# Altium PCB PCB1.PcbDoc
Units mil, origin at the board's own origin, x right, y up, seen from the top; angles counter-clockwise.
Board outline 6000 x 4000 mil, 2 copper layers (Top Layer, 2nd layer); 45 components, 28 nets, 127 pads, 38 vias.
Unrouted connection lines stored in the file: 7.
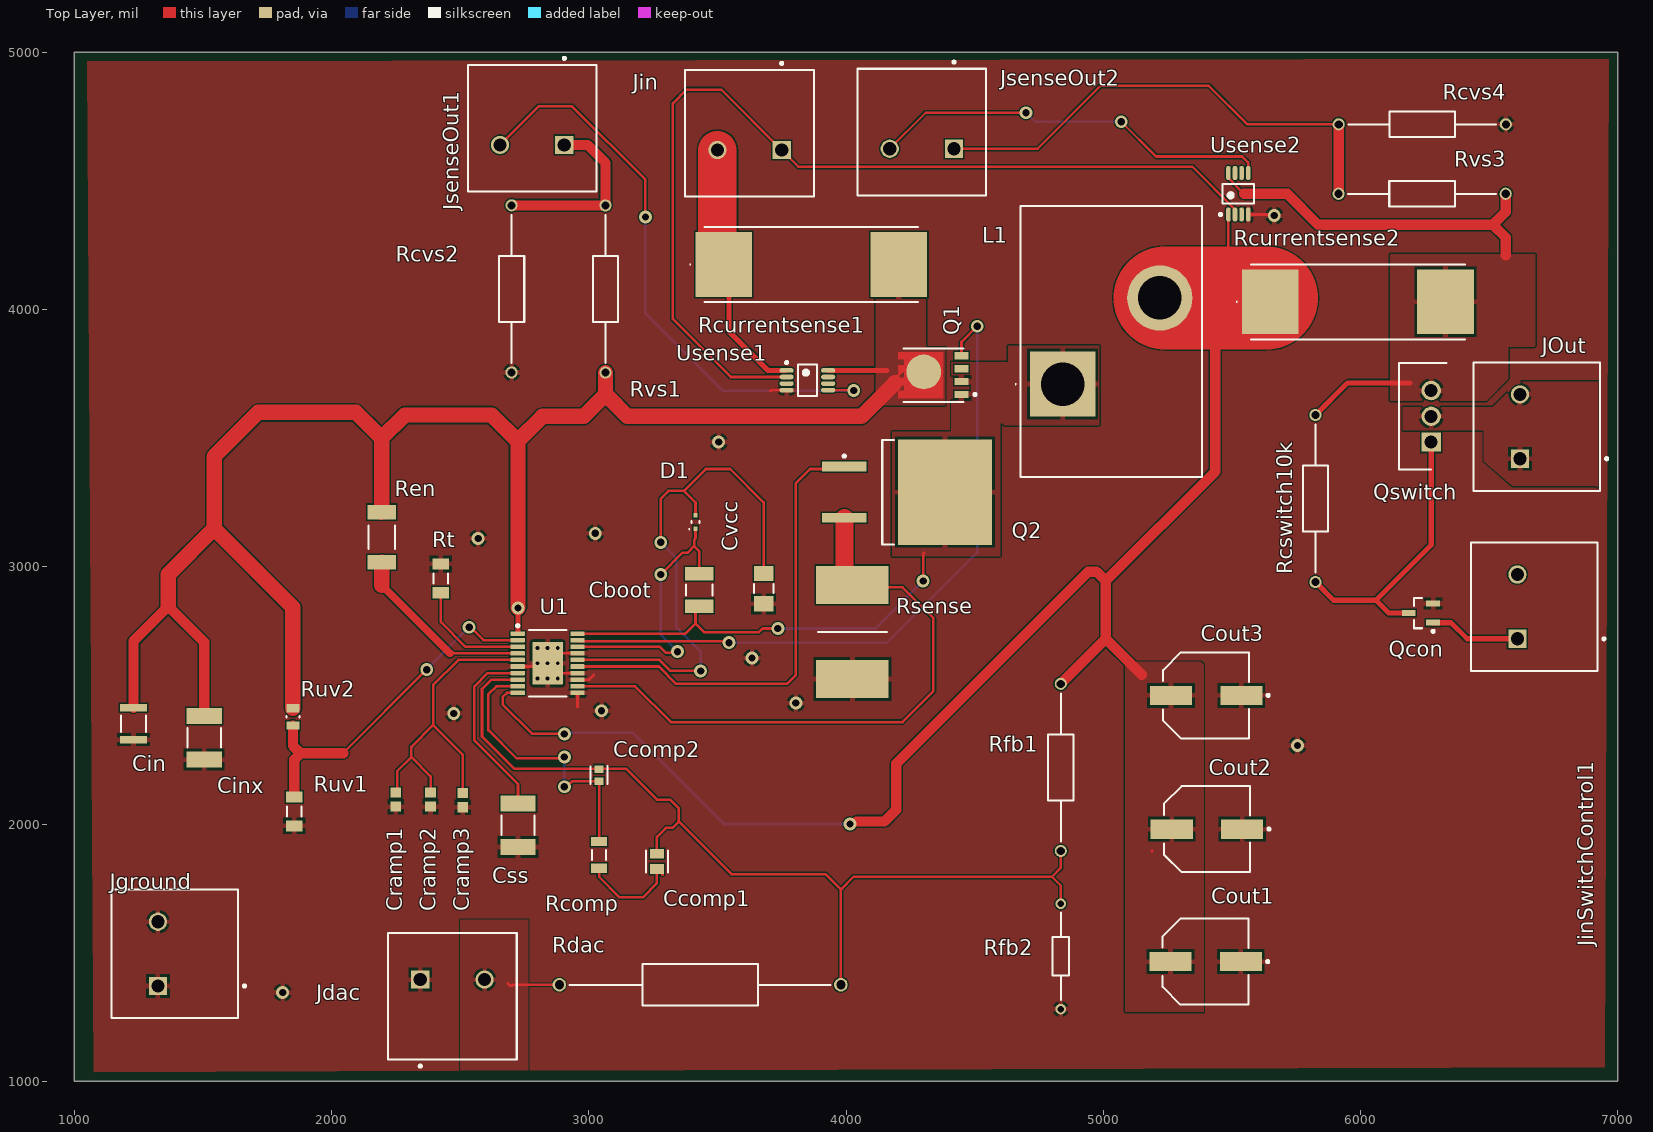
[diagram p0: Top Layer view]
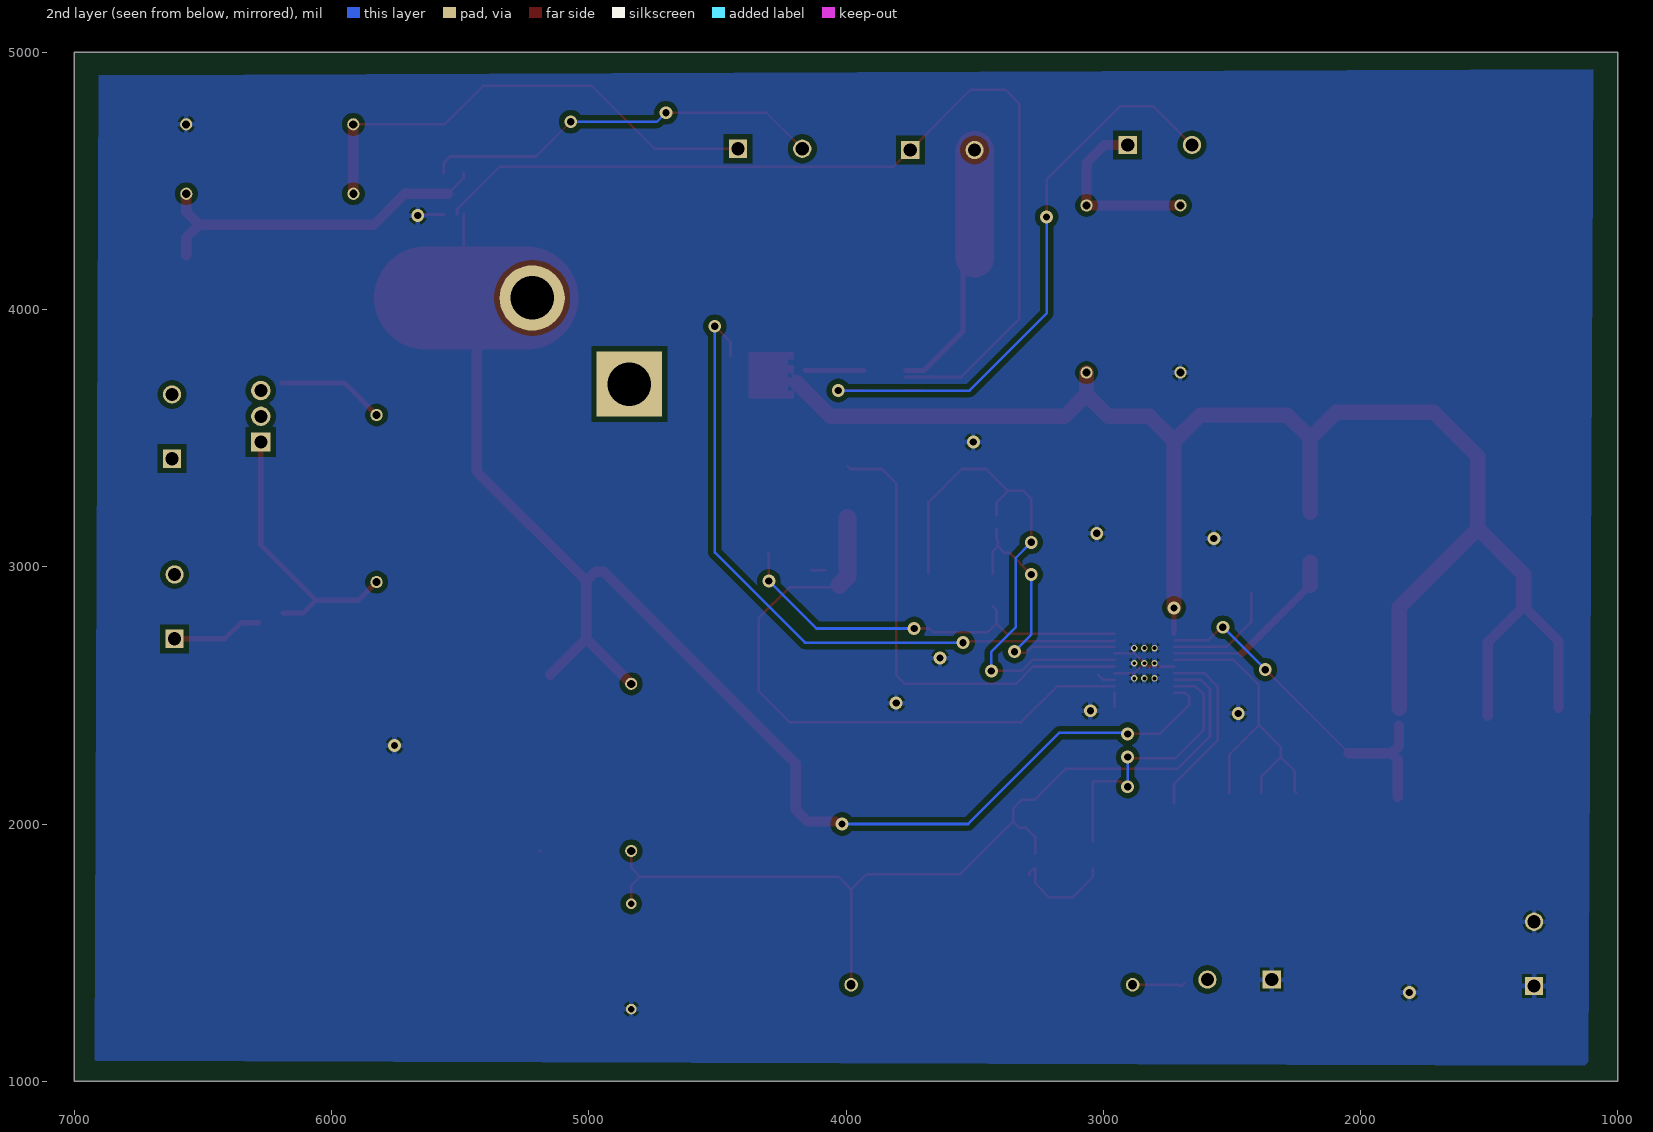
[diagram p1: 2nd layer view, seen from below]
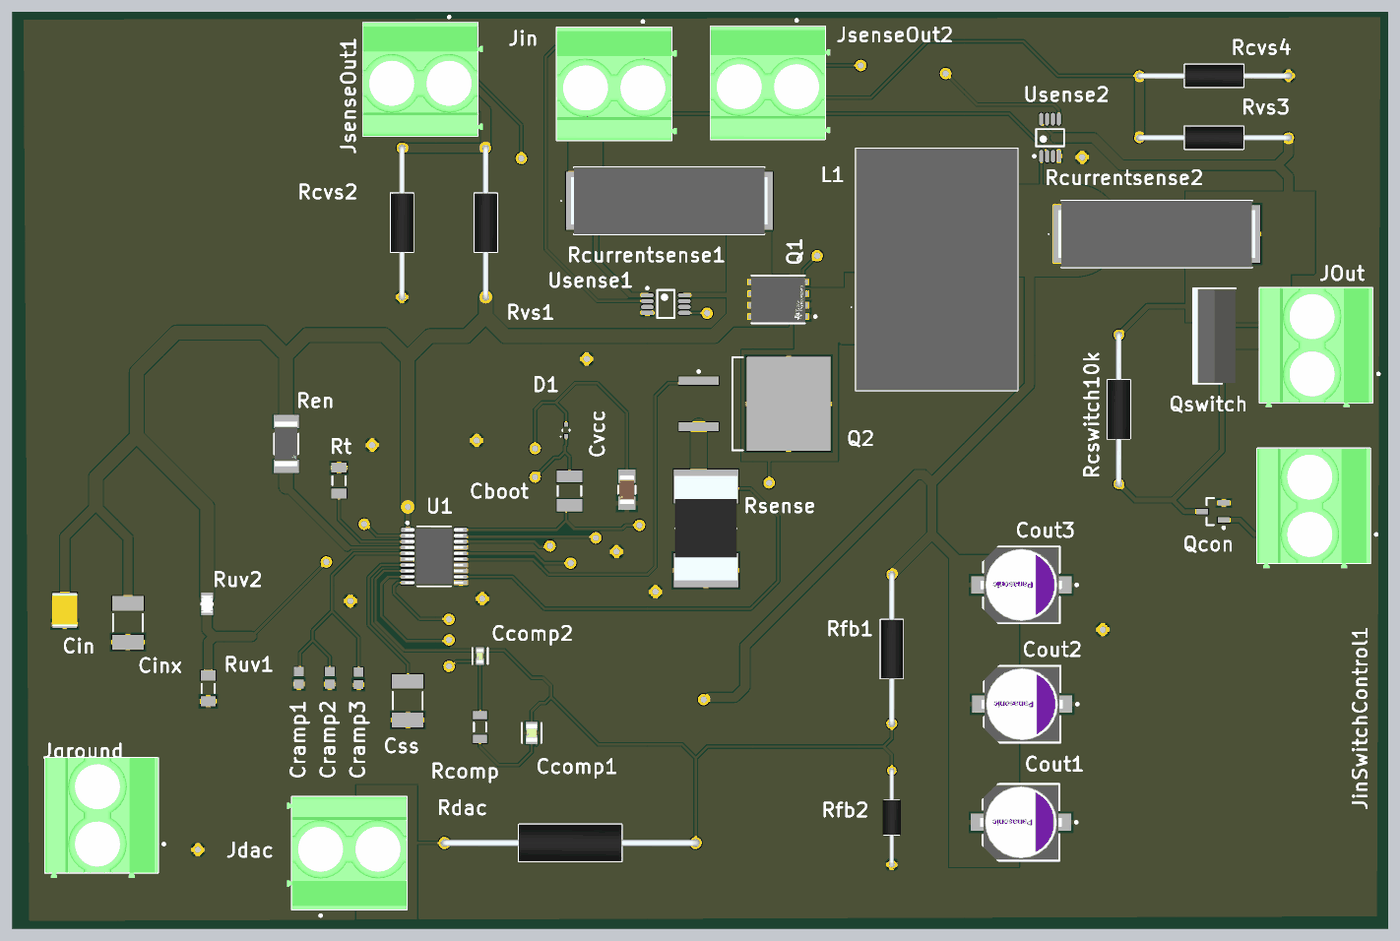
[diagram p2: 3D render of the assembled board from above, using the file's embedded part models]

## Layer stack, top to bottom
Top Solder: solder mask 0.4, Solder Resist, Dk 3.5
Top Layer: signal copper 1.4
Dielectric 1: dielectric 12.6, FR-4, Dk 4.8
2nd layer: signal copper 1.4
Bottom Solder: solder mask 0.4, Solder Resist, Dk 3.5

## Board outline
1000,1000 7000,1000 7000,5000 1000,5000

## Design rules (kind name [scope] priority, off if disabled: settings)
Clearance Clearance_POLY [InNamedPolygon('NONET_L01_P025') or InNamedPolygon('GND_L02_P020')] p1: gap=20 ignorepadtopadclearanceinfootprint=FALSE
Clearance [All] p2: gap=5 ignorepadtopadclearanceinfootprint=FALSE
HoleSize [All] p1: absolutevalues=TRUE maxlimit=250 minlimit=10 maxpercent=80.000 minpercent=20.000
PolygonConnect [All] p1: connectstyle=Relief reliefconductorwidth=20 reliefentries=4 polygonreliefangle="90 Angle" airgapwidth=10
RoutingVias [All] p1: holewidth=28 width=50 viastyle="Through Hole" minholewidth=28 minwidth=50 maxholewidth=28 maxwidth=50
SolderMaskExpansion [All] p1: expansion=4 istentingtop=FALSE
Width [All] p1: maxlimit=500 minlimit=10 preferedwidth=10
29 further rules are at their usual default settings.

## Components (designator, comment, footprint, x,y, rotation, side; value= is the part's Value field where it differs from the comment)
Cboot "CAP 100nF 50V 1210(3225)" CAPC1210(3225)155_M 3430,2910 r90 top value=100nF
Ccomp1 "C0805C821K5RACTU" FP-C0805C-DN-MFG 3265,1854.53 r90 top value="820 pF"
Ccomp2 "C0603C220K4GACTU" FP-C0603C-CF-MFG 3040,2190 r90 top value="22 pF"
Cin "C3225X7R2A225K230AB" CAPC3225X250X20LL40 1230,2390 r90 top
Cinx "CAP 100nF 250V 1812(4532)" CAPC1812(4532)230_M 1505,2335 r90 top value=100nF
Cout1 "25SVPF180M" FP-OS-CON-SMT-E12-MFG 5398.19,1465 r180 top
Cout2 "25SVPF180M" FP-OS-CON-SMT-E12-MFG 5403.19,1980 r180 top
Cout3 "25SVPF180M" FP-OS-CON-SMT-E12-MFG 5400,2500 r180 top
Cramp1 "VJ0603A471JXACW1BC" CAPC1608X87X40ML10T15 2250,2095 r270 top
Cramp2 "VJ0603A471JXACW1BC" CAPC1608X87X40ML10T15 2385,2095 r270 top
Cramp3 "VJ0603A471JXACW1BC" CAPC1608X87X40ML10T15 2510,2092.44 r270 top
Css "CAP 33nF 50V 1812(4532)" CAPC1812(4532)125_M 2725,1995.35 r90 top value=33nF
Cvcc "12063C105KAT2A" FP-1206-L_3_2_0_2-W_1_6_0-IPC_A 3680,2915 r270 top
D1 "BAS16XV2T1G" ONSC-SOD-523-2-502-01_V 3415,3174.02 r90 top
Jdac "1714955" PHOE-1714955_V 2470,1395 r0 top
Jground "1714955" PHOE-1714955_V 1325,1495 r90 top
Jin "1714955" PHOE-1714955_V 3625,4620 r180 top (schematic designator JIn)
JinSwitchControl1 "1714955" PHOE-1714955_V 6610,2845 r90 top
JOut "1714955" PHOE-1714955_V 6620,3545 r90 top (schematic designator Jout)
JsenseOut1 "1714955" PHOE-1714955_V 2780,4640 r180 top
JsenseOut2 "1714955" PHOE-1714955_V 4295,4625 r180 top
L1 "IHDM1107BBEV120M30" IHDM1107BBEV120M30 4842.05,3710.35 r90 top
Q1 "CSD19532Q5B" FP-DNK0008A-MFG 4340,3745 r180 top
Q2 "IPB027N10N3 G" INF-PG-TO-263-3-2_A_N 4237.36,3290 r0 top
Qcon "2N7002" INF-PG-SOT23_M 6235,2820 r180 top
Qswitch "IRF9540NPBF" TO254P469X1042X1967-3P 6275,3485 r90 top
Rcomp "ERJ-8ENF1103V" RESC3216X70X50LL05T20 3040,1880 r270 top
Rcswitch10k "MRS25000C1002FCT00" RESAD1650W60L650D250 5825,2940.39 r90 top
Rcurrentsense1 "SMR4D01" SMR4D01 3865,4175 r0 top
Rcurrentsense2 "SMR4D01" SMR4D01 5990,4030 r0 top
Rcvs2 "MRS25000C1002FCT00" RESAD1650W60L650D250 2700,3755.39 r90 top
Rcvs4 "MRS25000C1002FCT00" RESAD1650W60L650D250 6565,4720 r180 top
Rdac "F2W110" RESAD2780W70L1140D410 3980,1375 r180 top
Ren "CRCW20101M00FKEF" FP-CRCW2010-e3-MFG 2195,3115 r270 top
Rfb1 "MRS25000C8662FCT00" RESAD1650W60L650D250 4835,1895.39 r90 top
Rfb2 "CMF509K7600FHEB" RESAD1041W46L381D165 4835,1280.55 r90 top
Rsense "WSR23L000FEA" RESC11670X254N 4025,2746.93 r90 top
Rt "ERJ-8ENF3242V" RESC3216X70X50NL05T20 2425,2955 r270 top
Ruv1 "ERJ-8ENF5491V" RESC3216X70X50NL05T20 1855,2048.9 r90 top
Ruv2 "CRCW080564K9FKEA" FP-CRCW0805-e3-IPC_C 1850,2416.5 r270 top
Rvs1 "MRS25000C1002FCT00" RESAD1650W60L650D250 3065,3755 r90 top
Rvs3 "MRS25000C1002FCT00" RESAD1650W60L650D250 6564.61,4450 r180 top
U1 "LM5116MH/NOPB" PWP0020A_N 2840,2625 r0 top
Usense1 "MAX4080SAUA+T" MAXM-U8+1_L 3850,3725 r0 top
Usense2 "MAX4080SAUA+T" MAXM-U8+1_L 5525,4450 r90 top

## Footprints (in the part's own frame and the unit in brackets; to place one, negate y for a bottom-side part, rotate by r counter-clockwise, add the part's x,y. Pads: shape width x height; smd on the part's side, far side on the other; paste and mask are expansions set on the pad)
CAPC1210(3225)155_M [mm] "Chip Capacitor, Body 3.2x2.5mm, Height 1.55mm, IPC Low Density"
  rect 1.35x2.8 smd: 1(-1.6,0) 2(1.6,0)
  silkscreen extent -0.55,-1.3 0.55,1.3, body extent -1.7,-1.35 1.7,1.35, height 1.55
CAPC1608X87X40ML10T15 [mm] "Chip Capacitor, 2-Leads, Body 1.60x0.80mm, IPC Low Density"
  rect 1x1.05 smd: 1(-0.7,0) 2(0.7,0)
  body extent -0.85,-0.45 0.85,0.45, height 0.87
CAPC1812(4532)125_M [mm] "Chip Capacitor, Body 4.5x3.2mm, Height 1.25mm, IPC Low Density"
  rect 1.6x3.5 smd: 1(-2.15,0) 2(2.15,0)
  silkscreen extent -0.95,-1.65 0.95,1.65, body extent -2.4,-1.7 2.4,1.7, height 1.25
CAPC1812(4532)230_M [mm] "Chip Capacitor, Body 4.5x3.2mm, Height 2.3mm, IPC Low Density"
  rect 1.6x3.5 smd: 1(-2.15,0) 2(2.15,0)
  silkscreen extent -0.95,-1.65 0.95,1.65, body extent -2.4,-1.7 2.4,1.7, height 2.3
CAPC3225X250X20LL40 [mm] "Chip Capacitor, 2-Leads, Body 3.60x2.80mm, IPC High Density"
  rect 0.75x2.7 smd: 1(-1.575,0) 2(1.575,0)
  silkscreen extent -0.8,-1.25 0.8,1.25, body extent -1.8,-1.4 1.8,1.4, height 2.5
FP-1206-L_3_2_0_2-W_1_6_0-IPC_A [mil]
  rect 59.24x75.05 smd paste+0 mask+0: 1(-59.09,0) 2(59.09,0)
  silkscreen extent -18,-38 18,38, body extent -108,-57 108,57, height 10
FP-C0603C-CF-MFG [mm]
  rect 0.75x0.9 smd paste+0 mask+0: 1(-0.6,0) 2(0.6,0)
  silkscreen extent -0.87,-0.85 0.88,0.85, body extent -1.2,-0.6 1.2,0.6, height 0.25
FP-C0805C-DN-MFG [mm]
  rect 0.95x1.35 smd paste+0 mask+0: 1(-0.75,0) 2(0.75,0)
  silkscreen extent -1.1,-1.07 1.1,1.07, body extent -1.4,-0.85 1.4,0.85, height 0.25
FP-CRCW0805-e3-IPC_C [mil]
  rect 31.75x51.5 smd paste+0 mask+0: 1(-33.5,0) 2(33.5,0)
  silkscreen extent -3,-25 3,25, body extent -53,-31 53,31, height 10
FP-CRCW2010-e3-MFG [mm]
  rect 1.45x2.8 smd paste+0 mask+0: 1(-2.475,0) 2(2.475,0)
  silkscreen extent -1.14,-1.33 1.14,1.33, body extent -3.3,-1.5 3.3,1.5, height 0.25
FP-DNK0008A-MFG [mm]
  rect 1.372x0.71 smd paste-1000 mask+0: 1(-2.77,1.905) 2(-2.77,0.635) 3(-2.77,-0.635) 4(-2.77,-1.905)
  round 3.434 smd paste-1000 mask+0: 5-6-7-8(0.958,-0.317)
  Top Layer region: -0.984,-2.26 3.456,-2.26 3.456,-1.55 2.866,-1.55 2.866,-0.99 3.456,-0.99 3.456,-0.28 2.866,-0.28 2.866,0.28 3.456,0.28 3.456,0.99 2.866,0.99 2.866,1.55 3.456,1.55 3.456,2.26 -0.984,2.26
  silkscreen extent -4.23,-2.65 2.95,2.65, body extent -3.56,-2.65 3.56,2.65, height 0.25
FP-OS-CON-SMT-E12-MFG [mm]
  rect 4.15x1.9 smd paste+0 mask+0: 1(-3.475,0) 2(3.475,0)
  silkscreen extent -6.25,-4.25 4.25,4.25, body extent -5.8,-4.5 5.8,4.5, height 0.25
IHDM1107BBEV120M30 [mm]
  rect 6.45x6.45 hole 4.3: 1(0,0)
  round 6.45 hole 4.3: 2(8.5,-9.6)
  silkscreen extent -9.2,-13.75 17.6,4.7, body extent -9.2,-13.75 17.6,4.15, height 22.5
INF-PG-SOT23_M [mm] "SOT23, 3-Leads, Body 2.9x1.3mm, Pitch 0.95mm, IPC Low Density"
  rect 1.35x0.6 smd: 1(-1.2,0.95) 2(-1.2,-0.95) 3(1.2,0)
  silkscreen extent -1.33,-1.5 0.7,1.92, body extent -0.7,-1.5 0.7,1.5, height 1.1
INF-PG-TO-263-3-2_A_N [mm] "DPAK, 3-Leads, Body 10.06x8.98mm, Pitch 2.54mm, IPC Medium Density"
  rect 4.4x0.95 smd: 1(-6.2,2.54) 3(-6.2,-2.54)
  rect 9.3x10.4 smd: 2(3.75,0)
  silkscreen extent -6.32,-5.15 -1.3,5.15, body extent -2.45,-5.15 7,5.15, height 4.57
MAXM-U8+1_L [mm] "SOP, 8-Leads, Body 3x3mm, Pitch 0.65mm, IPC High Density"
  oval 1.4x0.45 smd: 1(-2.05,0.975) 2(-2.05,0.325) 3(-2.05,-0.325) 4(-2.05,-0.975) 5(2.05,-0.975) 6(2.05,-0.325) 7(2.05,0.325) 8(2.05,0.975)
  silkscreen extent -2.17,-1.55 0.95,1.87, body extent -1.55,-1.55 1.55,1.55, height 1.1
ONSC-SOD-523-2-502-01_V [mm] "SOD, 2-Leads, Body 1.2x0.8mm"
  rect 0.48x0.4 smd: 1(-0.66,0) 2(0.66,0)
  silkscreen extent -0.75,-0.4 0.07,0.65, body extent -0.6,-0.4 0.6,0.4, height 0.7
PHOE-1714955_V [mm] "Terminal Block, 2-Leads, Body 12.7x12.5mm, Pitch 6.35mm"
  rect 1.8x1.8 hole 1.3: 1(-3.175,0)
  round 1.8 hole 1.3: 2(3.175,0)
  silkscreen extent -6.35,-8.67 6.35,4.6, body extent -6.92,-7.9 6.35,4.6, height 21.51
PWP0020A_N [mm] "SOP, 20-Leads, Body 6.6x4.5mm, Pitch 0.65mm, Thermal Pad 4.2x3mm, IPC Medium Density"
  rrect22% 1.4x0.45 smd: 1(-2.95,2.925) 2(-2.95,2.275) 3(-2.95,1.625) 4(-2.95,0.975) 5(-2.95,0.325) 6(-2.95,-0.325) 7(-2.95,-0.975) 8(-2.95,-1.625) 9(-2.95,-2.275) 10(-2.95,-2.925) 11(2.95,-2.925) 12(2.95,-2.275) 13(2.95,-1.625) 14(2.95,-0.975) 15(2.95,-0.325) 16(2.95,0.325) 17(2.95,0.975) 18(2.95,1.625) 19(2.95,2.275) 20(2.95,2.925)
  rrect3% 3x4.2 smd: 21(0,0)
  silkscreen extent -3.07,-3.3 1.85,3.82, body extent -3.21,-3.25 3.21,3.25, height 1
RESAD1041W46L381D165 [mm]
  round 1.05 hole 0.65: 1(0,0) 2(10.4,0)
  silkscreen extent 0.87,-0.82 9.53,0.82, body extent -0.23,-1.01 10.64,1.01, height 2.03
RESAD1650W60L650D250 [mm]
  round 1.2 hole 0.8: 1(0,0) 2(16.5,0)
  silkscreen extent 0.95,-1.25 15.55,1.25, body extent -0.3,-1.24 16.8,1.24, height 2.5
RESAD2780W70L1140D410 [mm]
  round 1.35 hole 0.9: 1(0,0) 2(27.8,0)
  silkscreen extent 1.02,-2.05 26.78,2.05, body extent -0.35,-2.05 28.15,2.05, height 4.09
RESC3216X70X50LL05T20 [mm] "Chip Resistor, 2-Leads, Body 3.20x1.60mm, IPC High Density"
  rect 0.9x1.55 smd: 1(-1.325,0) 2(1.325,0)
  silkscreen extent -0.5,-0.67 0.5,0.67, body extent -1.63,-0.82 1.62,0.82, height 0.7
RESC3216X70X50NL05T20 [mm] "Chip Resistor, 2-Leads, Body 3.20x1.60mm, IPC Medium Density"
  rect 1.1x1.65 smd: 1(-1.425,0) 2(1.425,0)
  silkscreen extent -0.5,-0.72 0.5,0.72, body extent -1.63,-0.82 1.62,0.82, height 0.7
RESC11670X254N [mm]
  rect 3.75x7.15 smd: 1(-4.65,0) 2(4.65,0)
  silkscreen extent 0,-3.39 0,3.39, body extent -5.78,-3.49 5.78,3.49, height 2.54
SMR4D01 [mm]
  rect 5.6x6.4 smd: 1(-8.65,0) 2(8.65,0)
  silkscreen extent -12,-3.7 10.55,3.7, body extent -10.89,-3.7 10.89,3.7, height 7.3
TO254P469X1042X1967-3P [mm]
  rect 1.92x1.92 hole 1.28: 1(0,0)
  round 1.92 hole 1.28: 2(2.54,0) 3(5.08,0)
  silkscreen extent -2.73,-1.5 7.81,3.19, body extent -2.67,-1.5 7.75,3.19, height 18.84

## Part data
Cboot: library part CMP-1038-01650-1, "CAP 100nF 50V ±5% 1210 (3225 Metric) Thickness 1.45mm SMD", Case-EIA=1210, Case-Metric=3225, Rated Voltage="50 V", Tolerance=Â±5%, Max Thickness="1.45 mm", Technology=SMT
Ccomp1: library part CMP-2007-00409-2, "0805 C 820pF Ceramic Multilayer Capacitor; 50 VDC; +125degC; X7R Dielec; +/-10%", Capacitance="820 pF", Manufacturer=KEMET, Package=C0805C-DN, Temperature="-55°C to +125°C", Temperature Characteristic=X7R, Temperature Coefficient=30ppm/°C, Temperature Range High=+125°C, Temperature Range Low=-55°C, Tolerance=0.1, Voltage Rating="50 V", Automotive=No, Category=Cap, ComponentLink2Description=Datasheet, ComponentLink2URL=https://content.kemet.com/datasheets/KEM_C1003_C0G_SMD.pdf, Device Class L1="Passive Components", Device Class L2=Capacitors, Device Class L3="Ceramic Capacitors", Digikey Description="0805 C 820pF Ceramic Multilayer Capacitor; 50 VDC; +125degC; X7R Dielec; +/-10%", Height=0.88mm, Ipc Land Pattern Name=CAPC200125X78, Lead Free=Yes, Manufacturer Part Number=C0805C821K5RACTU, Material=Ceramic, Mouser Description="0805 C 820pF Ceramic Multilayer Capacitor; 50 VDC; +125degC; X7R Dielec; +/-10%", Octopart=https://octopart.com/c0805c821k5ractu-kemet-87425, RoHS=TRUE
Ccomp2: library part CMP-2006-03465-2, "CAP CER 22PF 16V 10% NP0 0603", Capacitance="22 pF", Manufacturer=KEMET, Package=C0603C-CF, Temperature="-55°C to +125°C", Temperature Characteristic=C0G, Temperature Coefficient=30ppm/°C, Temperature Range High=+125°C, Temperature Range Low=-55°C, Tolerance=0.1, Voltage Rating="16 V", Automotive=Yes, Automotive Grade="Grade 1", Category=Cap, ComponentLink2Description=Datasheet, ComponentLink2URL=https://api.kemet.com/component-edge/download/datasheet/C0603C100J5GACAUTO.pdf, Device Class L1="Passive Components", Device Class L2=Capacitors, Device Class L3="Ceramic Capacitors", Digikey Description="CAP CER 22PF 16V 10% NP0 0603", Height=0.87mm, Lead Free=Yes, Manufacturer Part Number=C0603C220K4GACTU, Material=Ceramic, Mouser Description="Multilayer Ceramic Capacitors MLCC - SMD/SMT 16volts 22pF C0G 10%", Octopart=https://octopart.com/c0603c220k4gactu-kemet-17097913, RoHS=TRUE
Cin: library part CMP-2000-06053-1, "Chip Capacitor, 2.2 uF, +/- 10%, -55 to 125 degC, 1210 (3225 Metric), RoHS, Tape and Reel", Capacitance=2.2µF, Manufacturer=TDK, Operating Temperature=-55°C~125°C, Package / Case=1210(3225Metric), Package Description="2-Pin Surface Mount Device, Body 3.2 x 2.5 mm", Package Reference="1210 (3225 Metric)", PCN Part Number=MLCCPartNumberChange30/Nov/2012, Ratings=-, Standard Package=1, Temperature Coefficient=X7R, Tolerance=±10%, Voltage - Rated=100V, Applications=GeneralPurpose, Catalog Drawings=CSERIES_1210_2.5, Category=Capacitors, Datasheet URL=https://datasheet.ciiva.com/15192/getdatasheetpartid-725361-15192330.pdf, Datasheet Version=10/2014, Family=CeramicCapacitors, Featured Product=C-SeriesMidVoltageMLCCs, Features=-, Height - Seated (Max)=-, Lead Spacing=-, Lead Style=-, Manufacturer URL=http://www.tdk.com/, Mounting Technology=SurfaceMount, Mounting Type=SurfaceMount,MLCC, Online Catalog=CSeries,MidVoltage, Other Names=445-4497-6, Packaging=Digi-Reel®, Product Training Modules=SEAT,CCV,andTVCLDesignToolsGuidetoReplacinganElectrolyticCapacitorwithanMLCC, RoHS Information=RoHSCertificate-MLCC, Series=C, Size / Dimension="0.126\"Lx0.098\"W(3.20mmx2.50mm)", Thickness (Max)="0.098\"(2.50mm)"
Cinx: library part CMP-1040-01320-2, "CAP 100nF 250V ±10% 1812 (4532 Metric) Thickness 2.3mm SMD", Case-EIA=1812, Case-Metric=4532, Rated Voltage="250 V", Tolerance=Â±10%, Max Thickness="2.3 mm", Technology=SMT
Cout1 Cout2 Cout3: library part CMP-05428-001075-1, "Conductive Polymer Aluminum Solid Capacitors (OS-CON) 180uF ±20% 25V", Capacitance=180uF, Case/Package=Radial, ESR (Equivalent Series Resistance)=16mR, Leakage Current=900uA, Max Operating Temperature=105°C, Min Operating Temperature=-55°C, Package Quantity=400, Ripple Current=4.65A, Tolerance=20%, Voltage=25V, Diameter=8mm, Dissipation Factor=12%, Height=11.9mm, Height - Seated (Max)=0.472inch, Lead Free="Lead Free", Length=11.9mm, Life (Hours)=5000Hour, Mount="Surface Mount", Number of Pins=12, Packaging="Tape and Reel", Polarity=Polar, REACH SVHC="No SVHC", Ripple Current (AC)=4.65A, RoHS Compliant=Yes, Series="OS-CON™, SVPF", Termination=SMD/SMT, Voltage Rating=25V, Voltage Rating (DC)=25V
Cramp1 Cramp2 Cramp3: library part CMP-2006-02033-1, Manufacturer=Vitramon, Part Number=VJ0603A471JXACW1BC
Css: library part CMP-1040-01069-2, "CAP 33nF 50V ±5% 1812 (4532 Metric) Thickness 1.25mm SMD", Case-EIA=1812, Case-Metric=4532, Rated Voltage="50 V", Tolerance=Â±5%, Max Thickness="1.25 mm", Technology=SMT
Cvcc: library part CMP-04427-000096-1, "General Purpose Ceramic Capacitor, 1206, 1uF, 10%, X7R, 15%, 25V", Capacitance=1uF, Case Code (Imperial)=1206, Case Code (Metric)=3216, Dielectric=X7R, Insulation Resistance=100GR, Max Operating Temperature=125°C, Min Operating Temperature=-55°C, Package Quantity=1, Tolerance=10%, Voltage=25V, Case/Package=1206, Construction=Flat, Contact Plating=Tin, Depth=1.6mm, Dissipation Factor=3%, Height=1.78mm, Lead Free="Lead Free", Length=3.2mm, Mount="Surface Mount", Number of Pins=2, Packaging="Tape and Reel", Radiation Hardening=No, REACH SVHC="No SVHC", RoHS Compliant=Yes, Series=-, Size=1.78mm, Termination=SMD/SMT, Thickness=0.07inch, Voltage Rating=25V, Voltage Rating (DC)=25V, Width=1.6mm
D1: library part CMP-1054-00076-1, "Switching Diode, 2-Pin SOD-523, Pb-Free, Tape and Reel", Manufacturer="On Semiconductor", ComponentLink1Description="Manufacturer URL", ComponentLink1URL=http://www.onsemi.com/, ComponentLink2Description=Datasheet, ComponentLink2URL=http://www.onsemi.com/pub_link/Collateral/BAS16XV2T1-D.PDF, ComponentLink3Description="Package Specification", ComponentLink3URL=http://www.onsemi.com/pub_link/Collateral/502-01.PDF, Configuration=Single, DatasheetVersion="Rev. 7", IF Max (A)=0.2, Mounting Technology="Surface Mount", PackageDescription="2-Pin SOD, Body 1.2 x 0.8 mm", PackageReference=SOD-523-2-502-01, PackageVersion="Rev. E, 09/2010", Packing="Tape and Reel", PartNumber=BAS16XV2T1G, RoHS=TRUE, trr Max (ns)=6
Jdac Jground Jin JinSwitchControl1 JOut JsenseOut1 JsenseOut2: library part CMP-2000-05797-1, "PC Terminal Block, Pitch 6.35 mm, 1 x 2 Position, Height 21.5 mm, Tail Lenght 5.1 mm, RoHS, Bulk", Manufacturer="Phoenix Contact", Package Description="PC Terminal Block, Pitch 6.35 mm, 1 x 2 Position, Height 21.5 mm, Tail Lenght 5.1 mm", Datasheet URL=http://media.digikey.com/pdf/Data%20Sheets/Phoenix%20Contact%20PDFs/1714955.pdf, Datasheet Version=02/2010, Manufacturer URL=http://www.phoenixcontact.com/, Mounting Technology=ThroughHole, Package Reference=1714955
L1: "Inductor", Manufacturer_Name=Vishay, Mouser Part Number=70-IHDM1107BBV120M30, Datasheet Link=https://www.vishay.com/docs/34574/ihdm-1107bb-x0.pdf, Height=22.4mm, Manufacturer_Part_Number=IHDM1107BBEV120M30, Mouser Price/Stock=https://www.mouser.co.uk/ProductDetail/Vishay-Dale/IHDM1107BBEV120M30?qs=XAiT9M5g4x%252B8WldDprrRlA%3D%3D
Q1: library part CMP-04962-000007-1, "MOSFET N-CH 100V 100A 8SON", Continuous Drain Current=100A, Drain To Source Breakdown Voltage=100V, Drain To Source Resistance=4.6mΩ, Gate To Source Voltage=20V, Input Capacitace At Vds="3700pF @ 50V", Manufacturer="Texas Instruments", Max Forward Diode Voltage=1V, Max Junction Temp=+150°C, Package=DNK0008A, Power Dissipation=3.1W, Pulse Drain Current=400A, Temperature="-55°C to +150°C", Temperature Range Low=-55°C, Typ Forward Diode Voltage=0.8V, Automotive=No, Category=Trans, ComponentLink2Description=Datasheet, ComponentLink2URL=http://www.ti.com/lit/ds/symlink/csd19532q5b.pdf, Depletion Mode=False, Device Class L1="Discrete Semiconductors", Device Class L2=Transistors, Device Class L3=MOSFETs, Digikey Description="MOSFET N-CH 100V 100A 8SON", Drain To Source Voltage=100V, Gate Charge At Vgs="48nC @ 10V", Height=1.05mm, Lead Free=Yes, Manufacturer Part Number=CSD19532Q5B, Mouser Description="MOSFET 100V 4.0 mOhm N-Ch NexFET Power MOSFET", Number Of Channels=1, Number Of N Channels=1, Octopart=https://octopart.com/csd19532q5b-texas+instruments-32890191, Reverse Recovery Charge=249nC, Reverse Recovery Time=80ns, RoHS=TRUE, Rthja Max=50°C/W, Temperature Range High=+150°C, Threshold Vgs Max=3.2V, Threshold Vgs Min=2.2V, Transconductance=84S, Turn Off Delay Time=22ns, Turn On Delay Time=7ns
Q2: library part CMP-1091-00256-1, "N-Channel OptiMOS 3 Power-Transistor, 100 V VDS, 120 A ID, -55 to 175 degC, PG-TO-263-3-2, Reel, Green", Manufacturer=Infineon, ComponentLink1Description="Manufacturer URL", ComponentLink1URL=http://www.infineon.com/, ComponentLink2Description=Datasheet, ComponentLink2URL=http://www.infineon.com/dgdl/IPB027N10N3+G_Rev2.4.pdf?folderId=db3a304313b8b5a60113cee8763b02d7&fileId=db3a30431ce5fb52011d1ed9348e15ef, ComponentLink3Description="Package Specification", ComponentLink3URL=http://www.infineon.com/dgdl/IPB026N06N_Rev2.2.pdf?folderId=db3a304313b8b5a60113cee8763b02d7&fileId=db3a3043372d5cc8013754c7b2a74f7c, DatasheetVersion="Rev. 2.4", Green=TRUE, Halogen-free=TRUE, ID (max)="120Â A", IDpuls (max)="480Â A", Mounting Technology="Surface Mount", PackageDescription="3-Pin Plastic (Green) Transistor Single Outline Package, 10.06 x 8.98 mm Body, 2.54 mm Pitch", PackageReference=PG-TO-263-3-2, PackageVersion="Rev. 01, 08/2007", Packing=Reel, PartNumber="IPB027N10N3 G", Polarity=N, Ptot (max)="300Â W", QG="155Â nC", RDS (on) (max)="2.7Â mOhm", Rth="0.5Â K/W", RthJA (max)="62 K/W", RthJC (max)="0.5Â K/W", VDS (max)="100Â V", VGS(th) (max)="3.5Â V", VGS(th) (min)="2Â V"
Qcon: library part CMP-1149-00026-1, "N-Channel OptiMOS Small-Signal-Transistor, 60 V VDS, 0.3 A ID, -55 to 150 degC, PG-SOT23, Reel, Green", Manufacturer=Infineon, ComponentLink1Description="Manufacturer URL", ComponentLink1URL=http://www.infineon.com/, ComponentLink2Description=Datasheet, ComponentLink2URL=http://www.infineon.com/dgdl/2N7002_Rev2.4.pdf?folderId=db3a3043156fd573011622e10b5c1f67&fileId=db3a304319bc939a0119c2a9461e79e6, ComponentLink3Description="Package Specification", ComponentLink3URL=http://www.infineon.com/dgdl/SOT23-Package_Overview.pdf?folderId=db3a30431936bc4b0119532290053c66&fileId=db3a30431936bc4b0119533468123c85, DatasheetVersion="Rev. 2.4", Green=TRUE, Halogen-free=TRUE, ID (max)="0.3Â A", IDpuls (max)="1.2Â A", Mounting Technology="Surface Mount", PackageDescription="3-Pin Small Outline Transistor Package, 2.9 x 1.3 mm Body, 0.95 mm Pitch", PackageReference=PG-SOT23, PackageVersion=Apr-08, Packing=Reel, PartNumber=2N7002, Ptot (max)="0.5Â W", QG="0.4Â nC", RDS (on) (max)="3,000 mOhm", RDS (on) (max) (@4.5V)="4,000 mOhm", RthJA (max)="250 K/W", VDS (max)="60 V", VGS(th) (max)="2.5Â V", VGS(th) (min)="1.5Â V"
Qswitch: "MOSFET (P-Channel)", Manufacturer_Name=Infineon, Mouser Part Number=942-IRF9540NPBF, Arrow Part Number=IRF9540NPBF, Arrow Price/Stock=https://www.arrow.com/en/products/irf9540npbf/infineon-technologies-ag?region=europe, Datasheet Link=https://www.infineon.com/dgdl/irf9540npbf.pdf?fileId=5546d462533600a401535611cfa21dc8, Height=4.69mm, Manufacturer_Part_Number=IRF9540NPBF, Mouser Price/Stock=https://www.mouser.co.uk/ProductDetail/Infineon-Technologies/IRF9540NPBF?qs=9%252BKlkBgLFf0vnuA8mxUPtw%3D%3D
Rcomp: library part CMP-2003-00042-1, Manufacturer=Panasonic, Part Number=ERJ-8ENF1103V
Rcswitch10k Rcvs2 Rcvs4 Rvs1 Rvs3: "Resistor", Manufacturer_Name=Vishay, Mouser Part Number=594-MRS25000C1002FCT, Arrow Part Number=MRS25000C1002FCT00, Arrow Price/Stock=https://www.arrow.com/en/products/mrs25000c1002fct00/vishay?region=nac, Datasheet Link=http://www.vishay.com/docs/28724/mrs16m25.pdf, Manufacturer_Part_Number=MRS25000C1002FCT00, Mouser Price/Stock=https://www.mouser.co.uk/ProductDetail/Vishay-BC-Components/MRS25000C1002FCT00?qs=H30XFsNYD%2FEwip42ZXddDQ%3D%3D
Rcurrentsense1 Rcurrentsense2 Rdac: "Resistor", Manufacturer_Name="NTE ELECTRONICS"
  Rcurrentsense1 Rcurrentsense2: Datasheet Link=https://www.nteinc.com/resistor_web/pdf/surface_mnt_ww.pdf, Height=7.2mm, Manufacturer_Part_Number=SMR4D01
  Rdac: Datasheet Link=https://www.nteinc.com/resistor_web/pdf/1w_2w_fusible.pdf, Manufacturer_Part_Number=F2W110
Ren: library part CMP-02407-002751-1, "RES Thick Film, 1MΩ, 1%, 0.75W, 100ppm/°C, 2010", Case Code (Imperial)=2010, Case Code (Metric)=5025, Max Operating Temperature=155°C, Max Power Dissipation=750mW, Min Operating Temperature=-55°C, Package Quantity=1, Resistance=1MR, Temperature Coefficient=100ppm/°C, Tolerance=1%, Voltage Rating=400V, Case/Package=2010, Composition="Thick Film", Contact Plating=Tin, Depth=2.5mm, Features="Automotive AEC-Q200", Height=0.028inch, Lead Free="Lead Free", Length=5mm, Military Standard=Not, Number of Pins=2, Number of Terminations=2, Packaging="Tape and Reel", Power Rating=750mW, Radiation Hardening=No, Termination=SMD/SMT, Voltage Rating (DC)=400V, Weight=0.000899oz, Width=2.5mm
Rfb1 Rfb2 Rsense: "Resistor", Manufacturer_Name=Vishay
  Rfb1: Datasheet Link=http://www.vishay.com/docs/28724/mrs16m25.pdf, Manufacturer_Part_Number=MRS25000C8662FCT00
  Rfb2: Datasheet Link=http://www.vishay.com/docs/31018/cmfind.pdf, Manufacturer_Part_Number=CMF509K7600FHEB
  Rsense: Datasheet Link=https://www.vishay.com/docs/30101/wsr.pdf, Height=2.537mm, Manufacturer_Part_Number=WSR23L000FEA
Rt: library part CMP-2003-00304-1, Manufacturer=Panasonic, Part Number=ERJ-8ENF3242V
Ruv1: library part CMP-2003-00421-1, Manufacturer=Panasonic, Part Number=ERJ-8ENF5491V
Ruv2: library part CMP-02407-008575-1, "RES Thick Film, 64.9kΩ, 1%, 0.125W, 100ppm/°C, 0805", Case Code (Imperial)=0805, Case Code (Metric)=2012, Max Operating Temperature=155°C, Max Power Dissipation=125mW, Min Operating Temperature=-55°C, Package Quantity=10, Resistance=64.9kR, Temperature Coefficient=100ppm/°C, Tolerance=1%, Voltage Rating=150V, Case/Package=0805, Composition="Thick Film", Contact Plating=Tin, Depth=1.25mm, Features="Automotive AEC-Q200", Height=0.45mm, Length=2mm, Military Standard=Not, Number of Pins=2, Number of Terminations=2, Packaging="Tape and Reel", Power Rating=125mW, Radiation Hardening=No, Termination=SMD/SMT, Weight=0.000194oz, Width=0.049inch
U1: library part CMP-0069-01480-3, "Wide Range Synchronous Buck Controller, 20-pin TSSOP-EP, Pb-Free", Manufacturer="Texas Instruments", PackageTopMarking=NSUZXYTT*LM5116*MH, PowerWise=Y, Code_JEDEC=MO-153-ACT, ComponentLink1Description="Datasheet URL", ComponentLink1URL=http://www.ti.com/general/docs/lit/getliterature.tsp?genericPartNumber=LM5116&fileType=pdf, CompType=Switcher, PackageDescription="Molded TSSOP, Jedec, 6.5 x 4.4 x 0.9mm Body, 20 Lead, 0.65mm Pitch, Exposed Pad", PackageReference=PWP0020A, PinCount=20, RoHS=Y
Usense1 Usense2: library part CMP-0252-00376-1, "76 V, High-Side, Uni-directional Current-Sense Amplifier, 60 V / V Gain, -40 to 125 degC, 8-Pin SOP (U8+1), Pb-Free, Tape and Reel", Bi-Dir. Curr. Sense=No, Code_JEDEC=MO-187, ComponentLink1Description="Manufacturer URL", ComponentLink1URL=http://www.maximintegrated.com/, ComponentLink2Description=Datasheet, ComponentLink2URL=http://datasheets.maximintegrated.com/en/ds/MAX4080-MAX4081.pdf, ComponentLink3Description="Package Specification", ComponentLink3URL=http://pdfserv.maximintegrated.com/package_dwgs/21-0036.PDF, DatasheetVersion="Rev. 4", Gain="5 V/V, 20 V/V ,60 V/V", Industry Qualified="Automotive - AECQ100, Automotive - General", Mounting Technology="Surface Mount", PackageDescription="8-Pin Micro-MAX, Thin Shrink Small-Outline (U8+1), Body 3 x 3 mm, Pitch 0.65 mm", PackageReference=U8+1, PackageVersion="Rev. L, 08/2009", PartNumber=MAX4080SAUA+T

## Via types
v1: diameter 50, hole 28, Top Layer to 2nd layer, 29 vias
v2: diameter 25, hole 15, Top Layer to 2nd layer, 9 vias

## Nets (pads, with @x,y where several pads share a name; then routed paths per layer and width w, separated by ;. In a path a pad name is that pad's centre, name@x,y a point inside that pad or via, vN(x,y) a via of type N, cw(c..) or ccw(c..) an arc to the next point about the centre after c; other vN are vias at no path point)
GND: Cin.1 Cinx.1 Cout1.1 Cout2.1 Cout3.1 Cramp1.2 Cramp2.2 Cramp3.2 Css.1 Cvcc.2 Jdac.1 Jground.1 Jground.2 Qcon.2 Rcvs2.1 Rcvs4.1 Rfb2.1 Rsense.1 Rt.1 Ruv1.1 U1.6 U1.11 U1.13 U1.14 U1.17 U1.21 Usense1.4 Usense2.4 | length 680.9
  Top Layer w10: U1.6 2827.2,2612.2 v2(2840,2625) ; 2955,2455 2956.14,2456.14 U1.11 ; U1.13 3001.02,2561.02 3020,2580 ; U1.14 2878.39,2586.61 v2(2840,2625) ; U1.17 2878.39,2663.39 v2(2840,2625) ; 3705,3685 3710,3685 3711.61,3686.61 Usense1.4 ; Usense2.4 5660.71,4369.29 v1(5665,4365)
  other v1: 1810,1345 5755,2305 2475,2430 3050,2440 3805,2470 3635,2645 2570,3110 3025,3130 3505,3485
  other v2: 2800.63,2565.94 2840,2565.94 2879.37,2565.94 2800.63,2625 2879.37,2625 2800.63,2684.06 2840,2684.06 2879.37,2684.06
NetCboot_1: Cboot.1 L1.1 Q1.1 Q1.2 Q2.2 U1.20 | length 1643
  Top Layer w10: U1.20 3375.16,2740.16 3415,2780 ; Cboot.1 3415,2832.01 3415,2780 ; v1(3735,2760) 3675.7,2760 3660.7,2745 3450,2745 3415,2780 ; v1(4300,2945) 4300,3050 4305,3055
  2nd layer w10: v1(3735,2760) 4115,2760 v1(4300,2945)
NetCboot_2: Cboot.2 D1.1 U1.18 | length 1088.7
  Top Layer w10: U1.18 3276.02,2688.98 3300,2665 3340,2665 v1(3345,2670) ; v1(3280,2970) 3365,3055 3385,3055 3410,3080 ; D1.1 3415,3110 3410,3105 3410,3080 ; Cboot.2 3430,3060 3410,3080
  2nd layer w10: v1(3280,2970) 3280,2735 v1(3345,2670)
NetCcomp1_1: Ccomp1.1 Rcomp.2 | length 403.9
  Top Layer w10: Rcomp.2 3040,1795 3120,1715 3210,1715 3265,1770 Ccomp1.1 3272.87,1825 3286.57,1811.3 3286.57,1803.43
NetCcomp1_2: Ccomp1.2 Ccomp2.2 Rdac.1 Rfb1.1 Rfb2.2 U1.8 | length 3630.4
  Top Layer w10: U1.8 2621.02,2561.02 2585,2525 2585,2340 2710,2215 3145,2215 3265,2095 3315,2095 3350,2060 3350,2010 ; Ccomp1.2 3265,1950 3300,1985 3325,1985 3350,2010 ; Rdac.1 3980,1745 ; Rfb2.2 4835,1760 4800,1795 ; Rfb1.1 4835,1830 4800,1795 ; 3350,2010 3555,1805 3920,1805 3980,1745 ; 3980,1745 4030,1795 4800,1795
NetCcomp2_1: Ccomp2.1 Rcomp.1 U1.9 | length 1102.2
  Top Layer w10: U1.9 2640.43,2535.43 2610,2505 2610,2365 2720,2255 2900,2255 v1(2905,2260) ; v1(2905,2145) 2915.82,2145 2937.2,2166.38 Ccomp2.1 Rcomp.1
  2nd layer w10: v1(2905,2145) v1(2905,2260)
NetCin_2: Cin.2 Cinx.2 Q1.5-6-7-8 Rcurrentsense1.2 Ren.1 Ruv2.1 Rvs1.1 U1.1 Usense1.8 | length 6824.9
  Top Layer w10: U1.1 U1.1@2725,2741.3 ; 2723.86,3488.86 2725,3487.72 ; 4158.39,3763.39 4160,3765 ; 4181.32,3723.68 4225.13,3767.5
  Top Layer w20: U1.1@2725,2741.3 v1(2725,2840) ; Usense1.8 4158.39,3763.39
  Top Layer w40: Cin.2 1230,2710 1365.86,2845.86 1505,2706.72 Cinx.2
  Top Layer w60: 1365.86,2845.86 1365.86,2970.86 1543.43,3148.43 ; Ruv2.1 1850,2841.86 1543.43,3148.43 ; Ren.1 2195,3500 ; v1(2725,2840) 2725,3487.72 ; Rvs1.1 3065,3670 2980,3585 2820,3585 2723.86,3488.86 2622.72,3590 2285,3590 2195,3500 ; 3070,3665 3150,3585 4060,3585 4190,3715 ; 1543.43,3148.43 1543.43,3428.43 1715,3600 2095,3600 2195,3500
NetCout1_2: Cout1.2 Cout2.2 Cout3.2 L1.2 Rcurrentsense2.1 Rfb1.2 U1.10 Usense2.1 | length 5956.1
  Top Layer w10: U1.10 2681.3,2509.84 2664.87,2493.41 2664.87,2465.13 2778.43,2351.57 2903.43,2351.57 v1(2905,2350) ; v1(4015,2000) 4022.65,2007.65 4038.51,2007.65 4040.86,2010 ; 5189.14,1894.14 5190,1895 ; L1.2 L1.2@5239.8,4045 ; Usense2.1 5486.61,4208.58 5634.45,4060.75 5634.45,4045 Rcurrentsense2.1@5634.45,3999.25
  Top Layer w40: 4040.86,2010 4150,2010 4195,2055 4195,2235 4940.93,2980.93 4974.07,2980.93 5010,2945 ; Rfb1.2 5010,2720 ; 5150,2580 5010,2720 ; 5435,4045 5435,3370 5010,2945 ; 5010,2720 5010,2945
  Top Layer w400: L1.2@5239.8,4045 5435,4045 Rcurrentsense2.1@5634.45,4045
  2nd layer w10: v1(2905,2350) 2910,2355 3170,2355 3525,2000 v1(4015,2000)
NetCramp1_1: Cramp1.1 Cramp2.1 Cramp3.1 U1.5 | length 1328
  Top Layer w10: Cramp1.1 2255,2127.56 2255,2205 2310,2260 ; Cramp2.1 2385,2185 2310,2260 ; Cramp3.1 2510,2270 2395,2385 ; U1.5 2492.8,2637.8 2395,2540 2395,2385 ; 2310,2260 2310,2300 2395,2385
NetCss_2: Css.2 U1.7 | length 715.7
  Top Layer w10: U1.7 2606.61,2586.61 2555,2535 2555,2325 2725,2155 Css.2
NetCvcc_1: Cvcc.1 D1.2 U1.16 | length 2121.8
  Top Layer w10: U1.16 3275.49,2637.8 3318.28,2595 v1(3435,2595) ; v1(3280,3095) 3280,3265 3310,3295 3370,3295 ; D1.2 3415,3250 3370,3295 ; Cvcc.1 3680,3250 3550,3380 3455,3380 3370,3295
  2nd layer w10: v1(3280,3095) 3340,3035 3340,2765 3435,2670 v1(3435,2595)
NetJdac_2: Jdac.2 Rdac.2 | length 205.4
  Top Layer w10: 2685,1380 2693.36,1371.64 2701.64,1371.64 2705,1375 Rdac.2
NetJin_1: Jin.1 Usense1.2 Usense2.2 | length 3794.9
  Top Layer w10: Usense1.2 3552.2,3737.8 3326.57,3963.43 3326.57,4801.57 3380,4855 3515,4855 Jin.1 3815,4555 5346.28,4555 5512.2,4389.07 Usense2.2
NetJin_2: Jin.2 Rcurrentsense1.1 Usense1.1 | length 1010.7
  Top Layer w10: Rcurrentsense1.1@3500,4199.45 Rcurrentsense1.1 Rcurrentsense1.1@3545,4154.45
  Top Layer w20: Rcurrentsense1.1@3545,4154.45 3545,3915 3696.61,3763.39 Usense1.1
  Top Layer w150: Rcurrentsense1.1@3500,4199.45 Jin.2
NetJinSwitchControl1_1: JinSwitchControl1.1 Qcon.1 | length 353.7
  Top Layer w20: Qcon.1 6352.4,2782.6 6415,2720 JinSwitchControl1.1
NetJOut_1: JOut.1 JOut.2 Qswitch.2
NetJsenseOut1_1: JsenseOut1.1 Rcvs2.2 Rvs1.2 | length 719.6
  Top Layer w10: Rcvs2.2 Rcvs2.2@2700.2,4404.8 ; Rvs1.2@3064.8,4404.8 Rvs1.2
  Top Layer w40: Rcvs2.2@2700.2,4404.8 Rvs1.2@3064.8,4404.8 ; JsenseOut1.1 2995,4640 3065,4570 Rvs1.2
NetJsenseOut1_2: JsenseOut1.2 Usense1.5 | length 2299.4
  Top Layer w10: JsenseOut1.2 2805,4790 2935,4790 3220,4505 v1(3220,4360) ; Usense1.5 3931.52,3685.81 4029.19,3685.81 v1(4030,3685)
  2nd layer w10: v1(3220,4360) 3220,3985 3520,3685 v1(4030,3685)
NetJsenseOut2_1: JsenseOut2.1 Rcvs4.2 Rvs3.2 | length 1929.2
  Top Layer w10: JsenseOut2.1 4745,4625 4990,4870 5410,4870 5560,4720 Rcvs4.2 Rcvs4.2@5915.2,4719.8 ; Rvs3.2 Rvs3.2@5915.2,4450.2
  Top Layer w40: Rvs3.2@5915.2,4450.2 Rcvs4.2@5915.2,4719.8
NetJsenseOut2_2: JsenseOut2.2 Usense2.5 | length 1572.4
  Top Layer w10: JsenseOut2.2 4310,4765 v1(4700,4765) ; v1(5070,4730) 5205,4595 5540,4595 5563.39,4571.61 Usense2.5
  2nd layer w10: v1(4700,4765) 4735,4730 v1(5070,4730)
NetQ1_4: Q1.4 U1.19 | length 2723
  Top Layer w10: U1.19 2960,2710.71 3539.29,2710.71 v1(3545,2705) ; Q1.4 4449.06,3874.06 v1(4510,3935)
  2nd layer w10: v1(3545,2705) 4160,2705 4510,3055 v1(4510,3935)
NetQ2_1: Q2.1 U1.15 | length 1851.4
  Top Layer w10: U1.15 3272.8,2612.2 3340,2545 3770,2545 3805,2580 3805,3325 3860,3380 3983.27,3380 Q2.1
NetQ2_3: Q2.3 Rsense.2 U1.12 | length 2471.2
  Top Layer w10: U1.12 3180.47,2535.43 3319.74,2396.16 4219.98,2396.16 4340,2516.18 4340,2800 4220,2920 4035,2920 Rsense.2 ; Rsense.2@4080.86,2986.93 Rsense.2@4135,2986.93
  Top Layer w70: Q2.3 3993.27,2961.73 Rsense.2
NetQcon_3: Qcon.3 Qswitch.1 Rcswitch10k.1 | length 1116.7
  Top Layer w20: Rcswitch10k.1 5895.39,2870 6060,2870 ; Qcon.3 6110,2820 6060,2870 ; Qswitch.1 6275,3085 6060,2870
NetQswitch_3: Qswitch.3 Rcswitch10k.2 Rcurrentsense2.2 Rvs3.1 Usense2.8 | length 1822.6
  Top Layer w10: Usense2.8 5486.61,4510.93 5547.54,4450
  Top Layer w20: Rcswitch10k.2 5950,3715 6191.5,3715
  Top Layer w40: 5547.54,4450 5715,4450 5835,4330 6515,4330 ; Rvs3.1 6564.61,4379.61 6515,4330 ; 6565,4210 6565,4280 6515,4330
NetRen_2: Ren.2 U1.4 | length 727.7
  Top Layer w10: 2460.16,2663.39 U1.4
  Top Layer w30: 2195,2928.55 2460.16,2663.39
  Top Layer w60: 2195,2928.55 Ren.2
NetRt_2: Rt.2 U1.3 | length 452.7
  Top Layer w10: Rt.2 2425,2784.72 2520.75,2688.98 U1.3
NetRuv1_2: Ruv1.2 Ruv2.2 U1.2 | length 1375.6
  Top Layer w10: Ruv2.2 Ruv2.2@1855,2378 ; 2045,2275 v1(2370,2600) ; v1(2535,2765) 2540,2765 2590.43,2714.57 U1.2
  Top Layer w40: Ruv2.2 1850,2305 1880,2275 ; Ruv1.2 1855,2250 1880,2275 ; 2045,2275 1880,2275
  2nd layer w10: v1(2370,2600) v1(2535,2765)
pads on no net: JinSwitchControl1.2 Q1.3 Usense1.3 Usense1.6 Usense1.7 Usense2.3 Usense2.6 Usense2.7

## Polygon pours and split planes (outlines as drawn)
NetJOut_1 on Top Layer "NETJOUT_1_L01_P028" (solid, pour order 28): 6165,3530 6165,3620 6515,3620 6615,3720 6925,3720 6925,3315 6920,3310 6915,3315 6590,3315 6480,3410 6480,3530
NetJdac_2 on Top Layer "NETJDAC_2_L01_P017" (solid, remove dead copper, pour order 17): 2500,1627.5 2765,1627.5 2765,1042.5 2500,1042.5
NetQswitch_3 on Top Layer "NETQSWITCH_3_L01_P027" (solid, pour order 27): 6115,4215 6680,4215 6680,3860 6675,3855 6575,3855 6575,3730 6490,3645 6115,3645
GND on Top Layer "GND_L01_P029" (solid, remove dead copper, pour order 29): 1050,4965 6965,4975 6950,1055 1075,1035 1075,1040 1050,4960
NetCin_2 on Top Layer "NETCIN_2_L01_P014" (solid, remove dead copper, pour order 14): 4115,4287.5 4310,4287.5 4310,3852.5 4385,3852.5 4385,3627.5 4115,3627.5 4115,3652.5
NetCboot_1 on Top Layer "NETCBOOT_1_L01_P024" (solid, remove dead copper, pour order 24): 4985,3860 4985,3550 4615,3550 4605,3560 4600,3555 4600,3040 4180,3040 4180,3525 4405,3525 4410,3530 4410,3795 4630,3795 4630,3860
NetCout1_2 on Top Layer "NETCOUT1_2_L01_P016" (solid, remove dead copper, pour order 16): 5085,2630 5085,1270 5390,1270 5390,2620 5380,2630
GND on 2nd layer "GND_L02_P020" (solid, remove dead copper, pour order 20): 1095,4935 6815,4910 6905,4910 6920,1080 1130,1060 1115,1075